# Altium PCB PCB_all_try.PcbDoc (part 3 of 5)
Units mm, origin at the board's own origin, x right, y up, seen from the top; angles counter-clockwise.
Board outline 345 x 240 mm, 2 copper layers (Top Layer, Bottom Layer); 484 components, 419 nets, 1569 pads, 699 vias.
Unrouted connection lines stored in the file: 63.
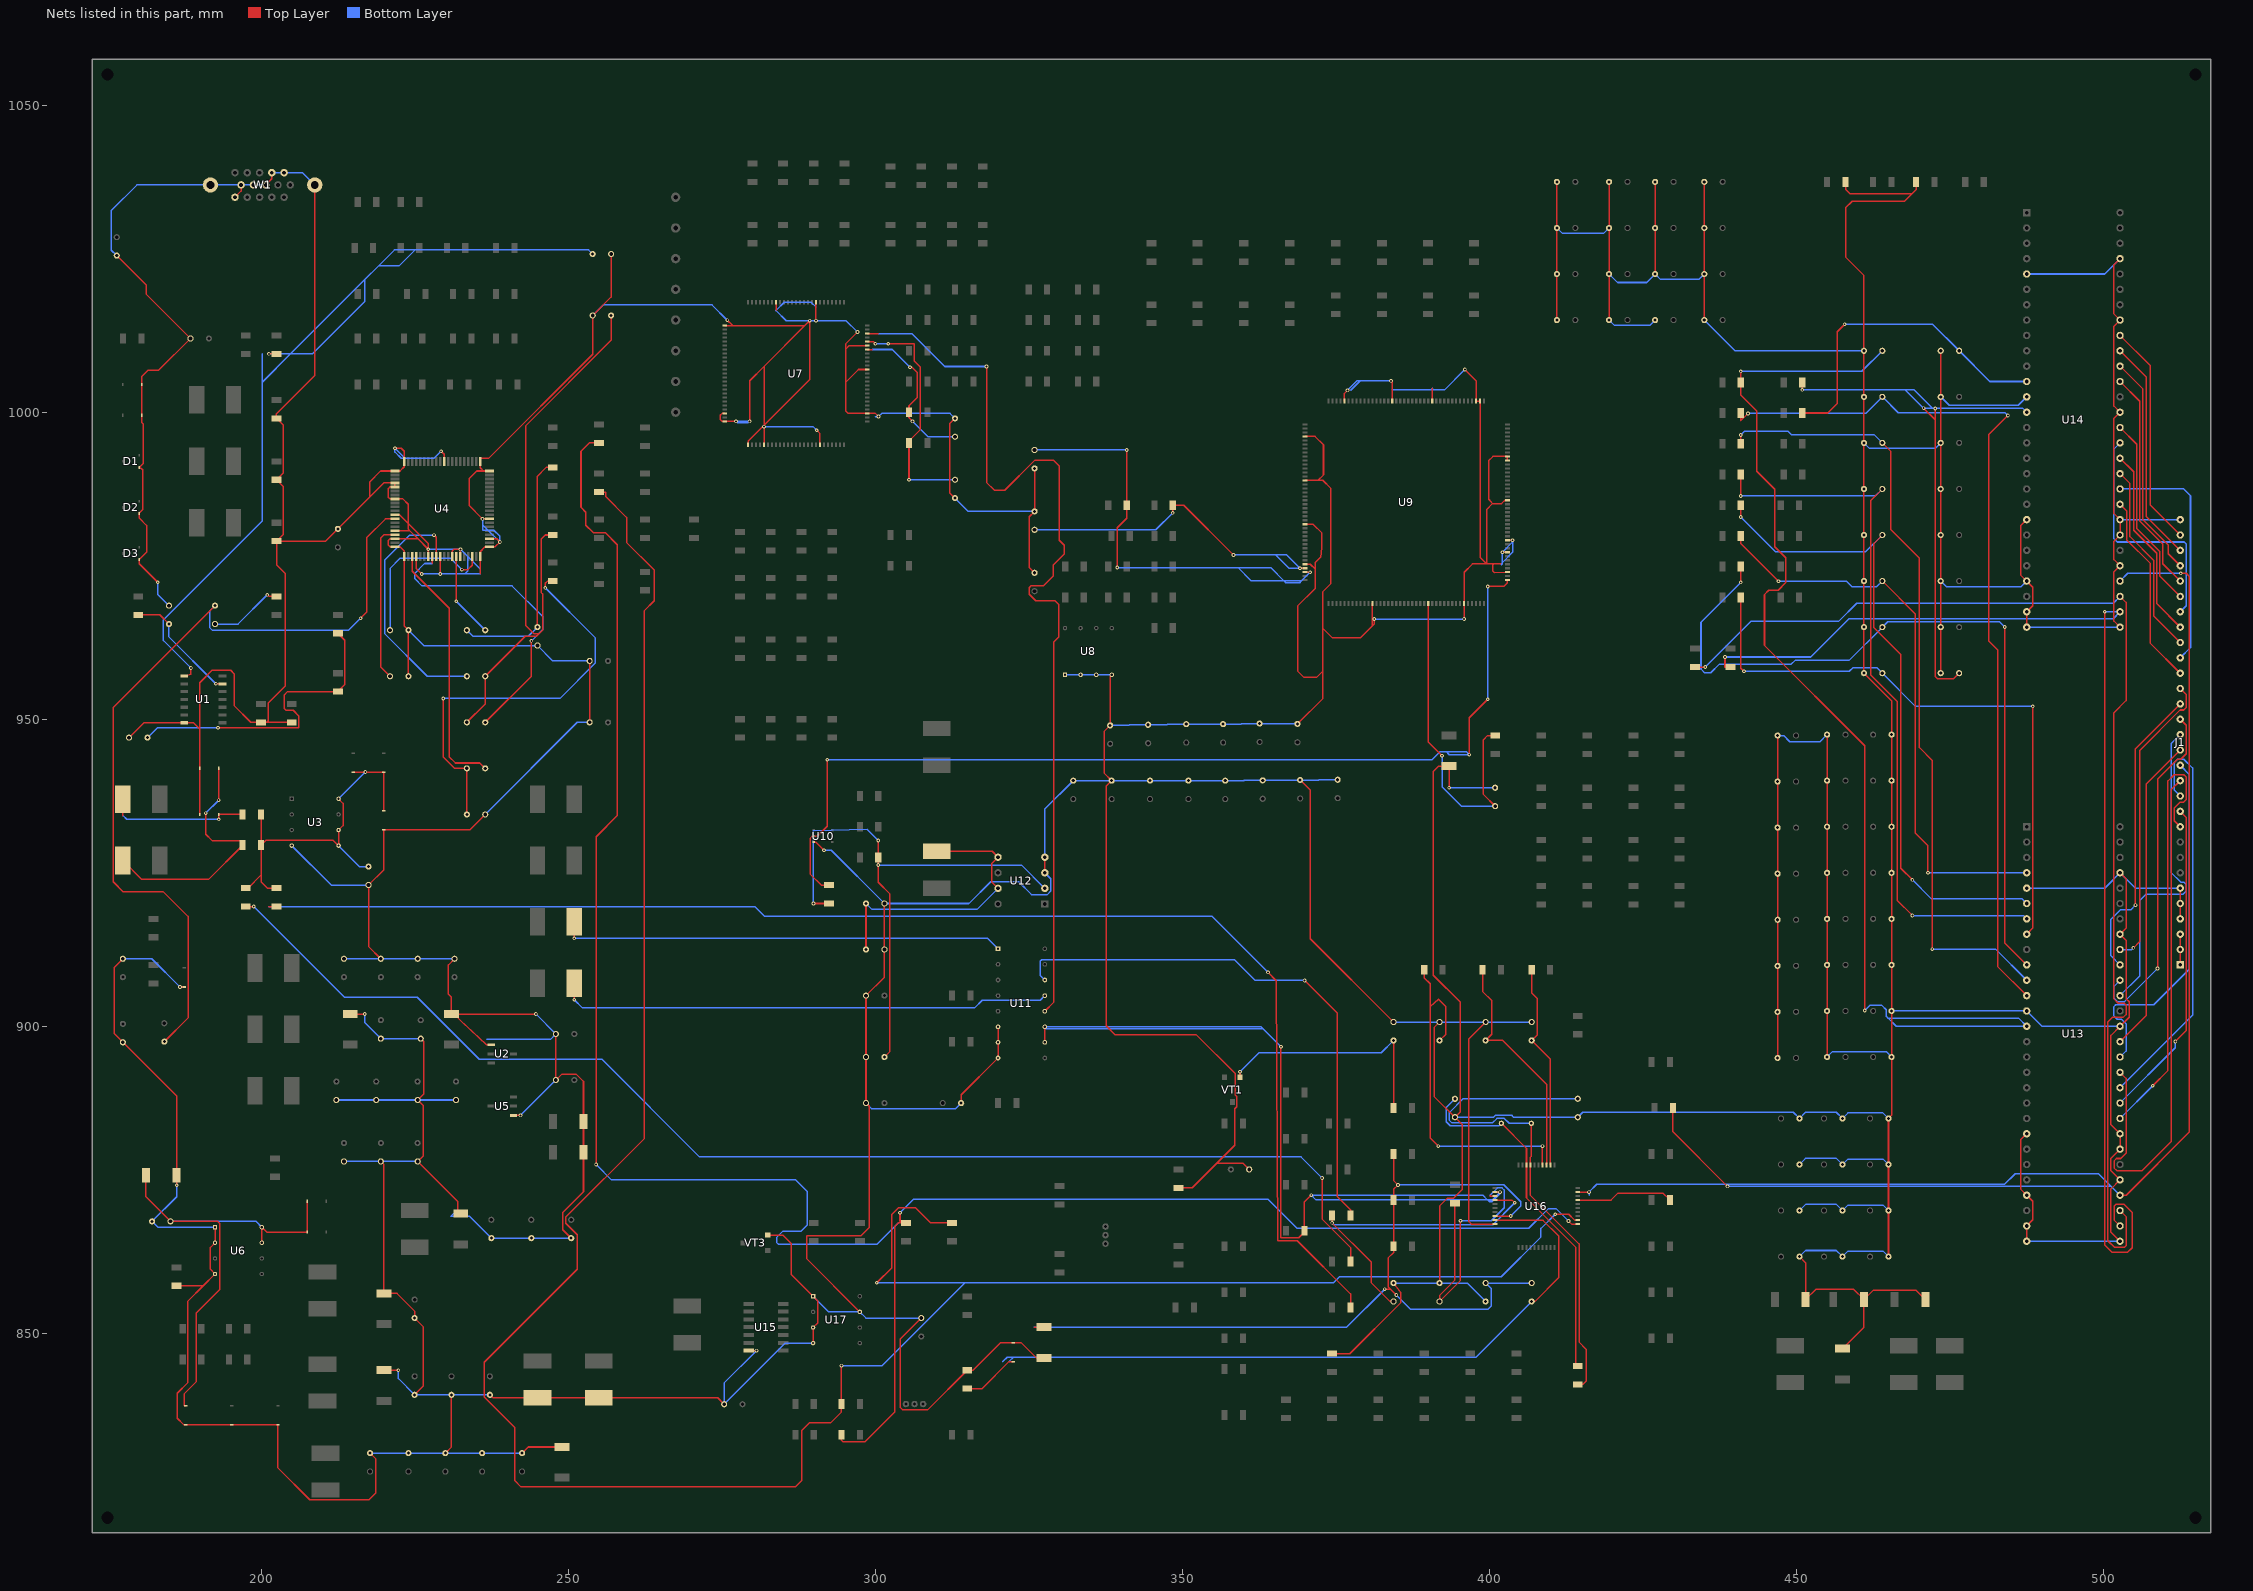
[diagram p3: the nets of this part, all layers, seen from the top]

## Via types
v1: diameter 0.6, hole 0.3, Top Layer to Bottom Layer, 699 vias

## Nets (pads, with @x,y where several pads share a name; then routed paths per layer and width w, separated by ;. In a path a pad name is that pad's centre, name@x,y a point inside that pad or via, vN(x,y) a via of type N, cw(c..) or ccw(c..) an arc to the next point about the centre after c; other vN are vias at no path point) (continued)
GA6: C112.2 R146.1 U14.12 | length 53.3
  Top Layer w0.25: R146.1@450.95,999.85 450.95,999.871 455.117,999.871 456.641,1001.395 456.641,1013.104 v1(457.86,1014.324)
  Bottom Layer w0.25: v1(457.86,1014.324) 472.176,1014.324 C112.2@476.5,1010 481.5,1005 U14.12@487.5,1005
GA7: C109.2 R145.1 U14.14 | length 95.7
  Top Layer w0.25: v1(450.95,1003.63) R145.1@450.95,1004.85 ; v1(470.713,1000.658) 472.618,998.753 ; v1(472.618,1000.613) 472.618,998.753 ; C109.2@476.5,957.5 475.615,956.615 472.948,956.615 472.618,956.945 472.618,998.753
  Bottom Layer w0.25: v1(450.95,1003.63) 467.741,1003.63 ; 472.161,1000.658 469.189,1003.63 467.741,1003.63 ; U14.14@487.5,1000 486.887,1000.613 v1(472.618,1000.613) 470.758,1000.613 v1(470.713,1000.658) 467.741,1003.63
GB0: C106.2 R144.1 U13.8 | length 99.6
  Top Layer w0.25: R144.1@440.95,969.85 440.95,958.317 v1(441.458,957.809) ; U13.8@487.5,915 488.493,915.993 v1(488.493,952.094)
  Bottom Layer w0.25: v1(441.458,957.809) 458.622,957.809 459.207,958.393 463.107,958.393 C106.2@464,957.5 469.406,952.094 v1(488.493,952.094)
GB1: C103.2 R143.1 U13.10 | length 129.4
  Top Layer w0.25: v1(440.95,972.287) R143.1@440.95,974.85 ; v1(483.921,965.022) 483.921,913.579 U13.10@487.5,910
  Bottom Layer w0.25: v1(440.95,972.287) 434.467,965.804 434.467,958.164 435.051,957.58 436.067,957.58 437.464,958.977 449.174,958.977 449.783,959.587 458.587,959.587 C103.2@464,965 464.879,965.879 483.064,965.879 v1(483.921,965.022)
GB2: C100.2 R142.1 U13.4 | length 94.2
  Top Layer w0.25: R142.1@440.95,979.85 440.95,978.611 v1(447.097,972.464) ; C100.2@464,972.5 469.341,967.159 469.341,931.469 471.424,929.386 v1(471.424,925)
  Bottom Layer w0.25: v1(447.097,972.464) 458.14,972.464 459.003,971.601 463.101,971.601 C100.2@464,972.5 ; v1(471.424,925) U13.4@487.5,925
GB3: C96.2 R141.1 U13.6 | length 108
  Top Layer w0.25: v1(440.95,982.929) R141.1@440.95,984.85 ; C96.2@464,980 462.617,978.617 462.617,964.888 466.979,960.526 466.979,925.754 v1(468.884,923.849)
  Bottom Layer w0.25: v1(440.95,982.929) 446.614,977.265 461.265,977.265 C96.2@464,980 ; v1(468.884,923.849) 471.932,920.801 486.699,920.801 U13.6@487.5,920
GB4: C92.2 R140.1 U13.7 | length 118.9
  Top Layer w0.25: v1(440.95,986.358) R140.1@440.95,989.85 ; C92.2@464,987.5 462.113,985.613 462.113,957.214 466.395,952.932 466.395,920.521 v1(468.884,918.032)
  Bottom Layer w0.25: v1(440.95,986.358) 462.858,986.358 C92.2@464,987.5 ; v1(468.884,918.032) 486.968,918.032 U13.7@487.5,917.5
GB5: C87.2 R139.1 U13.11 | length 128.8
  Top Layer w0.25: R139.1@440.95,994.85 v1(440.95,996.29) ; C87.2@464,995 465.383,993.617 465.383,980.868 470.027,976.224 470.027,945.388 472.11,943.305 v1(472.11,912.571)
  Bottom Layer w0.25: v1(440.95,996.29) 441.55,996.89 448.633,996.89 449.234,996.29 462.71,996.29 C87.2@464,995 ; v1(472.11,912.571) 482.429,912.571 U13.11@487.5,907.5
GB6: C83.2 R138.1 U13.12 | length 145.9
  Top Layer w0.25: R138.1@440.95,999.85 440.95,998.632 v1(442.112,999.795) ; v1(484.429,999.465) 481.33,996.366 481.33,962.736 482.822,961.244 482.822,909.678 U13.12@487.5,905
  Bottom Layer w0.25: v1(442.112,999.795) 461.295,999.795 C83.2@464,1002.5 466.578,999.922 483.972,999.922 v1(484.429,999.465)
GB7: C79.2 R137.1 U13.14 | length 192.5
  Top Layer w0.25: v1(440.95,1006.653) R137.1@440.95,1004.85 440.95,1002.792 443.56,1000.182 443.56,990.371 446.481,987.45 446.481,978.103 448.275,976.309 448.275,972.252 447.04,971.017 445.516,971.017 444.805,970.305 444.805,962.025 461.137,945.693 v1(461.137,902.589)
  Bottom Layer w0.25: v1(440.95,1006.653) 460.653,1006.653 C79.2@464,1010 ; v1(461.137,902.589) 461.95,903.402 463.935,903.402 464.621,902.716 464.621,901.624 464.9,901.344 ; 464.9,901.344 466.245,900 U13.14@487.5,900 486.156,901.344 464.9,901.344
GND: C1.2 C2.2 C3.2 C4.2 C5.2 C6.2 C7.2 C8.2 C9.2 C10.2 C11.2 C12.2 C13.2 C14.2 C15.2 C17.2 C18.2 C19.2 C25.1 C26.2 C27.1 C28.2 C29.1 C30.2 C31.2 C32.2 C33.2 C34.2 C35.2 C36.2 C37.2 C38.2 C39.2 C40.2 C41.2 C42.2 C43.2 C44.1 C45.1 C46.1 C47.1 C48.1 C49.1 C50.1 C51.1 C52.2 C53.1 C54.1 C55.1 C56.1 C57.2 C58.1 C59.1 C60.1 C61.1 C62.1 C63.1 C64.2 C65.1 C66.1 C67.1 C68.1 C69.1 C70.1 C71.1 C72.1 C73.1 C74.1 C75.1 C76.1 C77.1 C78.1 C79.1 C80.1 C81.1 C82.1 C83.1 C84.1 C85.1 C86.1 C87.1 C88.1 C89.1 C90.1 C91.1 C92.1 C93.1 C94.1 C95.1 C96.1 C97.1 C98.1 C99.1 C100.1 C101.1 C102.1 C103.1 C104.1 C105.1 C106.1 C107.1 C108.1 C109.1 C110.1 C111.1 C112.1 C113.1 C114.1 C115.1 C116.1 C117.1 C118.1 C119.1 C120.1 C121.1 C122.1 C123.1 C124.1 C125.1 C126.1 C127.1 C128.2 C129.2 C130.1 C131.2 C132.2 C133.2 C134.2 C135.2 C136.2 C137.2 C138.1 C139.1 C140.1 C141.1 C142.1 C143.1 C144.1 C145.1 C146.1 C147.1 C148.1 C149.1 C150.1 C151.1 C152.1 C153.1 C154.1 C155.1 C156.1 C157.1 C158.2 C159.1 C160.2 C161.2 C162.1 C163.2 C164.2 C165.1 C166.2 C168.2 C169.2 C170.2 C171.2 C172.1 D1.1 D2.1 D3.1 D8.1 J1.4 J1.5 J1.6 J1.30 L16.1 L17.1 R3.1 R5.1 R15.1 R16.1 R17.1 R49.1 R178.1 R180.1 R204.1 R205.1 R218.1 U1.7 U2.1 U3.4 U4.1 U4.10 U4.20 U4.21 U4.24 U4.25 U4.28 U4.32 U4.36 U4.38 U4.40 U4.41 U4.44 U4.47 U4.50 U4.53 U4.55 U4.60 U4.61 U4.63 U4.68 U4.80 U5.1 U6.1 U6.2 U6.4 U7.1 U7.5 U7.19 U7.28 U7.39 U7.45 U7.58 U7.68 U7.76 U7.98 U7.100 U8.1 U8.2 U8.3 U8.4 U9.12 U9.35 U9.43 U9.48 U9.51 U9.61 U9.71 U9.72 U9.82 U9.83 U9.94 U9.104 U9.116 U9.124 U9.135 U9.146 U9.156 U10.3 U11.6 U11.7 U11.8 U12.3 U12.4 U13.5 U13.13 U13.21 U13.25 U13.27 U13.28 U13.29 U13.33 U13.35 U13.36 U13.43 U13.49 U13.53 U14.5 U14.13 U14.21 U14.25 U14.27 U14.28 U14.29 U14.33 U14.35 U14.36 U14.43 U14.49 U14.53 U15.7 U16.20 U17.1 U17.3 U17.4 U17.7 VT3.2 W1.4 W1.5 W1.6 W1.7 W1.8 W1.11 W1.16 W1.17 ZD1.1 ZD2.1 ZD3.1 ZD4.1 ZD5.1 ZD6.1 ZD7.1 ZD8.1 ZD9.1 | length 3369.4
  Top Layer w0.25: C172.1@176.5,1025.5 181.331,1020.669 181.331,1019.169 C10.2@188.5,1012 183.356,1006.856 181.616,1006.856 180.6,1005.84 ZD1.1@180.6,1004.5 ZD2.1@180.6,999.5 180.6,998.265 180.797,998.068 180.797,991.647 D1.1@180.156,991.006 ; C5.2@177.5,911 176.117,909.617 176.117,898.783 C13.2@177.5,897.4 186.25,888.65 C52.2@186.25,875.75 186.25,874.124 v1(186.258,874.116) ; C11.2@178.5,947 180.92,949.42 U1.7@187.5,949.42 188.976,949.42 190,948.396 ; D1.1@180.15,991 D1.1@180.156,991.006 ; v1(183.185,972.3) 180.15,975.335 D3.1@180.15,976 181.356,977.206 181.356,981.571 180.15,982.777 D2.1@180.15,983.5 180.15,983.564 180.746,984.161 180.746,990.6 D1.1@180.156,991.006 ; R49.1@186.25,857.75 190.58,857.75 ; v1(186.792,906.399) v1(186.792,906.399) ZD4.1@187.5,906.4 ; ZD3.1@190,934.5 ZD5.1@190,942 190,948.396 ; U6.1@192.5,867.29 U6.2@192.5,864.75 191.745,863.995 191.745,860.425 U6.4@192.5,859.67 190.58,857.75 ; W1.11@195.75,1035 196.75,1036 W1.6@196.75,1037 ; W1.8@200.75,1037 201.75,1038 W1.4@201.75,1039 ; R5.1@205,949.5 200.914,949.5 ; W1.16@208.75,1037 208.75,1005.954 202.489,999.693 202.489,999 R15.1@202.5,999 203.632,997.868 203.632,990.132 R16.1@202.5,989 203.632,987.868 203.632,980.132 R17.1@202.5,979 R17.1@202.514,979 ; C14.2@214.5,902 v1(216.882,902) ; C54.1@217.75,830.5 218.643,829.607 218.643,823.976 217.576,822.909 207.924,822.909 202.75,828.084 ZD7.1@202.75,835.15 ZD8.1@195.25,835.15 ZD9.1@187.75,835.15 187.378,835.15 186.36,836.168 186.36,840.257 188.087,841.985 188.087,855.257 190.58,857.75 ; C28.2@219.5,878 220,877.5 C41.2@220,856.5 222.136,856.5 225,853.636 C44.1@225,852.5 226.383,851.117 226.383,841.383 C45.1@225,840 ; C2.2@219.5,911 217.5,913 C15.2@217.5,923 220,925.5 ZD6.1@220,932 234,932 C19.2@236.5,934.5 ; C42.2@220,844 v1(222.355,844) ; U4.36@221.778,980.675 224.243,980.675 ; U4.32@221.778,983.275 222.565,983.275 223.952,981.888 ; v1(221.801,994.138) 222.817,994.138 223.325,993.63 U4.20@223.325,991.972 223.325,991.108 222.642,990.425 U4.21@221.778,990.425 219.456,990.425 217.678,988.647 217.678,986.178 ; C29.1@224,957 C27.1@224,964.5 223.325,965.175 U4.41@223.325,976.528 223.325,977.392 222.642,978.075 U4.40@221.778,978.075 220.98,978.075 220.701,978.354 220.701,979.096 220.98,979.375 U4.38@221.778,979.375 225.543,979.375 ; U4.44@225.275,976.528 225.275,974.553 v1(226.17,973.658) ; C9.2@226,898 226.492,897.508 226.492,888.992 C32.2@225.5,888 226.39,887.11 226.39,878.89 C26.2@225.5,878 232.029,871.471 232.029,869.5 C57.2@232.5,869.5 ; U4.47@227.225,976.528 v1(227.225,977.693) ; v1(229.175,973.658) U4.50@229.175,976.528 ; v1(229.317,993.648) 229.825,993.14 U4.10@229.825,991.972 ; C51.1@230,830.5 231,831.5 C47.1@231,840 ; U4.53@231.125,976.528 231.125,977.397 231.394,977.666 v1(232.467,977.666) ; C4.2@231.5,911 230.505,910.005 230.505,905.231 231,904.736 C6.2@231,902 C6.2@231.318,902 ; U4.55@232.425,976.528 v1@232.425,977.624 ; 235.675,973.67 U4.60@235.675,976.528 235.675,977.276 236.474,978.075 U4.61@237.222,978.075 238.096,978.075 v1(238.888,978.867) 238.38,979.375 U4.63@237.222,979.375 ; U4.68@237.222,982.625 v1(236.068,982.625) 233.865,984.828 233.865,989.16 235.13,990.425 236.22,990.425 ; U4.80@237.222,990.425 236.22,990.425 ; C50.1@237.25,840 237.75,839.5 L16.1@245,839.5 L17.1@255,839.5 274.36,839.5 C158.2@275.4,838.46 ; U2.1@237.5,897 236.728,897 C6.2@231.318,902 ; U5.1@241.1,885.5 v1(242.25,885.5) ; C46.1@242.5,830.5 243.5,831.5 C43.2@249,831.5 ; v1(244.75,902) C6.2@231.318,902 ; C36.2@248,898.75 C38.2@248,891.25 248.925,892.175 251.357,892.175 252.5,891.032 C40.2@252.5,884.5 C35.2@252.5,879.5 252.5,873.073 249.117,869.69 249.117,866.883 C60.1@250.5,865.5 ; C39.2@253.5,949.5 C37.2@253.5,959.5 ; C8.2@257,1025.75 257,1018.75 C18.2@254,1015.75 254,1009.44 237.039,992.48 235.675,992.48 U4.1@235.675,991.972 235.675,990.97 236.22,990.425 ; U7.98@275.5,999.8 275.062,999.8 274.752,999.49 274.752,998.83 275.082,998.5 U7.100@275.5,998.5 v1(277.343,998.5) ; U7.76@275.5,1014.1 276.809,1014.1 ; v1(275.925,1014.984) 276.809,1014.1 ; U7.1@279.3,994.7 279.3,995.278 v1@281.9,997.878 ; U15.7@279.4,847.19 v1(280.67,847.19) ; v1(279.553,998.5) 279.553,1005.109 281.9,1007.456 ; U7.5@281.9,994.7 v1(281.9,997.652) v1@281.9,997.878 ; VT3.2@282.5,866 284.95,866 286.334,864.616 286.334,859.586 U17.1@289.88,856.04 290.627,855.293 290.627,851.707 U17.3@289.88,850.96 U17.4@289.88,848.42 ; 283.85,1016.564 U7.68@283.85,1017.9 ; U10.3@290,930 290.322,930 v1(291.647,928.675) ; v1(290.35,1014.908) U7.58@290.35,1017.9 ; v1(290.492,997.052) 291,996.544 U7.19@291,994.7 ; v1(297.104,1013.054) 295.17,1011.12 295.17,1010.229 ; U17.7@297.5,853.5 288.874,862.126 288.874,865.886 297.688,865.886 299.034,867.232 299.034,886.966 C128.2@298.5,887.5 C129.2@298.5,895 C131.2@298.5,905 301.5,908 C132.2@301.5,912.5 C133.2@301.5,920 ; U7.39@298.7,1006.95 297.274,1006.95 295.17,1004.846 ; U7.45@298.7,1010.85 295.791,1010.85 295.17,1010.229 ; v1(300.543,999.292) 300.035,999.8 U7.28@298.7,999.8 295.614,999.8 295.17,1000.244 295.17,1004.846 ; C171.2@307.5,852.5 304.089,849.089 304.089,837.946 304.444,837.59 308.59,837.59 R205.1@315,844 315.938,844 320.438,848.5 D8.1@322.5,848.5 323.748,848.5 326.248,846 C163.2@327.5,846 ; C55.1@313,986 312.115,986.885 312.115,998.115 C56.1@313,999 ; C130.1@314,887.5 314,888.84 U11.8@320,894.84 U11.7@320,897.38 U11.6@320,899.92 ; C62.1@325.95,973.85 325.069,974.731 325.069,982.969 C61.1@325.95,983.85 C63.1@325.95,990.85 ; U12.3@327.62,925 327.606,925.014 327.606,927.526 U12.4@327.62,927.54 ; U8.4@338.53,957.23 338.25,956.95 C98.1@338.25,949 337.261,948.011 337.261,941.239 C73.1@338.5,940 337.617,939.117 337.617,900.074 339.09,898.601 352.31,898.601 358.648,892.263 358.648,888.795 358.875,888.568 358.875,886.892 358.546,886.563 358.546,880.618 355.625,877.697 ; R218.1@349.4,873.7 351.628,873.7 355.625,877.697 ; C169.2@360.9,876.7 359.903,877.697 355.625,877.697 ; C77.1@368.75,949.25 372.897,953.397 372.897,957.859 ; C66.1@369.2,940.1 370.84,938.46 370.84,914.26 C170.2@384.4,900.7 ; U9.156@370,975.25 370.84,975.25 371.644,974.446 ; U9.146@370,981.75 371.308,981.75 372.741,980.317 372.741,977.963 372.516,976.376 371.644,975.504 371.644,974.446 ; U9.135@370,988.9 372.112,988.9 ; U9.124@370,996.05 371.632,996.05 372.999,994.683 372.999,989.787 372.112,988.9 ; R204.1@374.4,846.7 377.276,846.7 385.54,854.964 385.54,856.691 C162.1@384.4,858.2 ; U9.116@376.4,1001.8 376.4,1003.046 v1(376.908,1003.554) ; U9.12@380.95,968.85 380.95,965.2 ; v1(381.255,966.318) 381.255,965.505 380.95,965.2 ; v1(383.988,1005.103) 384.2,1004.892 U9.104@384.2,1001.8 ; U9.94@390.7,1001.8 390.7,1003.856 ; C159.1@391.9,858.2 391.9,870.741 393.192,872.033 394.208,872.033 395.605,873.43 395.605,883.995 C161.2@394.4,885.2 ; C164.2@391.9,900.7 391.008,899.808 391.008,888.592 C161.2@394.4,885.2 ; v1(393.45,938.85) C64.2@393.45,942.35 391.744,942.35 390.881,941.486 390.881,908.329 395.3,903.91 395.3,886.1 C161.2@394.4,885.2 ; v1(395.9,966.318) U9.35@395.9,968.85 395.9,973.928 397.256,975.284 399.578,975.284 ; v1(396.013,1006.958) 397.85,1005.121 U9.83@397.85,1001.8 U9.82@398.5,1001.8 398.5,976.362 399.578,975.284 ; C166.2@399.4,900.7 396.672,897.972 396.672,868.198 397.069,867.8 U16.20@400.95,867.8 ; 401.879,975.284 400.72,975.284 ; v1(402.133,977.2) U9.48@402.95,977.2 ; U9.43@402.95,973.95 402.717,973.95 400.812,973.887 400.558,974.141 400.558,975.122 400.72,975.284 ; U9.51@402.95,979.15 403.778,979.15 v1(403.784,979.145) ; U9.61@402.95,985.65 402.536,985.65 401.999,985.113 400.532,985.113 ; U9.71@402.95,992.15 U9.72@402.95,992.8 400.599,992.8 399.923,992.124 399.923,985.831 400.532,985.113 ; C76.1@411,1015 C74.1@411,1022.5 C72.1@411,1030 C70.1@411,1037.5 ; C91.1@419.5,1015 C86.1@419.5,1022.5 C82.1@419.5,1030 C78.1@419.5,1037.5 ; C102.1@427,1022.5 C99.1@427,1030 C95.1@427,1037.5 ; C117.1@435,1015 C114.1@435,1022.5 C111.1@435,1030 C108.1@435,1037.5 ; C107.1@446.95,894.85 C104.1@446.95,902.35 C101.1@446.95,909.85 C97.1@446.95,917.35 C93.1@446.95,924.85 C88.1@446.95,932.35 C84.1@446.95,939.85 C80.1@446.95,947.35 ; C138.1@450.5,862.5 451.5,861.5 C135.2@451.5,855.5 453.148,857.148 459.352,857.148 C136.2@461,855.5 ; C127.1@455,895 C125.1@455,902.5 C123.1@455,910 C121.1@455,917.5 C119.1@455,925 C116.1@455,932.5 C113.1@455,940 C110.1@455,947.5 ; C134.2@457.5,847.5 461,851 C136.2@461,855.5 ; R180.1@458,1037.5 458,1036.307 458.724,1035.583 468.814,1035.583 ; C140.1@465,862.5 C143.1@465,870 C146.1@465,877.5 C149.1@465,885 465.5,885.5 C150.1@465.5,895 C151.1@465.5,902.5 C152.1@465.5,910 C153.1@465.5,917.5 C154.1@465.5,925 C155.1@465.5,932.5 C156.1@465.5,940 C157.1@465.5,947.5 465.5,953 C106.1@461,957.5 C103.1@461,965 C100.1@461,972.5 C96.1@461,980 C92.1@461,987.5 C87.1@461,995 C83.1@461,1002.5 C79.1@461,1010 461,1022.248 458,1025.248 458,1033.272 459.079,1034.351 467.582,1034.351 468.814,1035.583 ; R178.1@469.5,1037.5 469.5,1036.269 468.814,1035.583 ; C137.2@471,855.5 469.453,857.047 462.547,857.047 C136.2@461,855.5 ; C109.1@473.5,957.5 C126.1@473.5,965 C124.1@473.5,972.5 C122.1@473.5,980 C120.1@473.5,987.5 C118.1@473.5,995 C115.1@473.5,1002.5 C112.1@473.5,1010 ; U13.28@487.5,865 U13.27@487.5,867.5 488.493,868.493 488.493,871.507 U13.25@487.5,872.5 486.512,873.488 486.512,881.512 U13.21@487.5,882.5 ; U14.28@487.5,965 U14.27@487.5,967.5 488.493,968.493 488.493,971.507 U14.25@487.5,972.5 486.512,973.488 486.512,981.512 U14.21@487.5,982.5 ; U13.29@502.7,865 501.217,866.483 501.217,873.517 U13.33@502.7,875 501.217,876.483 501.217,878.517 U13.35@502.7,880 U13.36@502.7,882.5 501.217,883.983 501.217,898.517 U13.43@502.7,900 504.183,901.483 504.183,903.983 503.682,904.484 503.682,914.018 U13.49@502.7,915 503.682,915.982 503.682,924.018 U13.53@502.7,925 ; U14.29@502.7,965 501.701,965.999 501.701,974.001 U14.33@502.7,975 501.701,975.999 501.701,979.001 U14.35@502.7,980 U14.36@502.7,982.5 501.701,983.499 501.701,999.001 U14.43@502.7,1000 501.701,1000.999 501.701,1014.001 U14.49@502.7,1015 501.701,1015.999 501.701,1024.001 U14.53@502.7,1025 ; J1.4@512.5,917.5 J1.5@512.5,920 J1.6@512.5,922.5 ; 190,948.396 190,955.937 192.024,957.961 195.072,957.961 195.605,957.428 195.605,952.221 198.326,949.5 R3.1@200,949.5 200.914,949.5 ; 200.914,949.5 201.168,949.754 201.168,952.627 203.911,955.37 203.911,973.76 202.514,975.157 R17.1@202.514,979 ; R17.1@202.514,979 210.5,979 C25.1@212.5,981 217.678,986.178 ; 217.678,986.178 219.975,988.475 U4.24@221.778,988.475 U4.25@221.778,987.825 220.974,987.825 220.701,987.552 220.701,986.154 220.98,985.875 U4.28@221.778,985.875 223.089,985.875 223.952,985.012 223.952,981.888 ; 223.952,981.888 223.952,980.967 224.243,980.675 ; 223.952,981.888 227.225,978.615 v1(227.225,977.693) ; 224.243,980.675 225.543,979.375 ; 225.543,979.375 v1(227.225,977.693) ; 276.809,1014.1 288.544,1014.1 ; v1@281.9,997.878 289.352,1005.33 v1(289.352,1014.908) 288.544,1014.1 ; v1@281.9,997.878 281.9,1007.456 ; 281.9,1007.456 288.544,1014.1 ; 295.17,1004.846 295.17,1010.229 ; 371.644,974.446 371.644,971.295 368.783,968.433 368.783,957.859 369.824,956.818 371.856,956.818 372.897,957.859 ; 372.112,988.9 372.872,988.9 374.204,987.569 374.204,972.094 372.897,970.788 372.897,964.794 ; 372.897,957.859 372.897,964.794 ; 372.897,964.794 374.447,963.244 378.994,963.244 380.95,965.2 ; 399.578,975.284 400.72,975.284 ; 399.578,975.284 399.578,984.159 400.532,985.113
  Bottom Layer w0.25: C172.1@176.5,1025.5 175.616,1026.384 175.616,1032.84 179.775,1037 W1.17@191.75,1037 W1.6@196.75,1037 W1.7@198.75,1037 W1.8@200.75,1037 ; C5.2@177.5,911 182.191,911 v1(186.792,906.399) ; v1(183.185,972.3) 183.185,970.315 C7.2@185,968.5 ; v1(186.258,874.116) 186.258,872.258 C49.1@182.25,868.25 183.21,867.29 U6.1@192.5,867.29 ; W1.4@201.75,1039 W1.5@203.75,1039 206.75,1039 W1.16@208.75,1037 ; U3.4@205,929.42 211.42,923 C15.2@217.5,923 ; C34.2@212.25,888 C33.2@218.75,888 C32.2@225.5,888 C31.2@231.75,888 ; C30.2@213.5,878 C28.2@219.5,878 C26.2@225.5,878 ; C1.2@213.5,911 C2.2@219.5,911 C3.2@225.5,911 C4.2@231.5,911 ; v1(216.882,902) 216.882,900.618 C12.2@219.5,898 C9.2@226,898 ; C54.1@217.75,830.5 C53.1@224,830.5 C51.1@230,830.5 C48.1@236,830.5 C46.1@242.5,830.5 ; v1(222.355,844) 222.355,842.645 C45.1@225,840 C47.1@231,840 C50.1@237.25,840 ; C27.1@224,964.5 226.5,962 C17.2@245,962 247.5,959.5 C37.2@253.5,959.5 ; v1(226.17,973.658) v1(229.175,973.658) v1@229.378,973.658 ; v1(227.225,977.693) v1@232.432,977.693 ; v1@229.175,973.861 v1@229.378,973.658 ; v1(229.317,993.648) 228.159,992.49 223.449,992.49 ; 232.029,869.5 231.325,869.5 230.861,869.036 233.964,869.036 C58.1@237.5,865.5 C59.1@244,865.5 C60.1@250.5,865.5 ; v1@232.425,977.624 v1(232.467,977.666) ; v1@232.435,977.697 v1@232.432,977.693 ; 235.675,973.67 235.663,973.658 ; 235.675,974.457 233.68,976.452 ; 235.687,973.658 235.663,973.658 ; v1(236.068,982.625) 236.068,981.687 ; C19.2@236.5,934.5 251.5,949.5 C39.2@253.5,949.5 ; 236.728,897.865 247.115,897.865 C36.2@248,898.75 v1(244.75,902) ; v1(242.25,885.5) C38.2@248,891.25 ; C18.2@254,1015.75 255.723,1017.473 273.436,1017.473 v1(275.925,1014.984) ; 279.298,998.245 277.597,998.245 v1(277.343,998.5) v1(279.553,998.5) ; v1(280.67,847.19) 275.4,841.92 C158.2@275.4,838.46 285.36,848.42 U17.4@289.88,848.42 ; v1(281.9,997.652) 289.891,997.652 v1(290.492,997.052) ; U17.1@289.88,856.04 292.42,853.5 U17.7@297.5,853.5 298.5,852.5 C171.2@307.5,852.5 ; 290.35,1017.118 289.563,1017.905 285.191,1017.905 283.85,1016.564 ; v1(291.647,928.675) 292.825,928.675 C133.2@301.5,920 315.251,920 318.795,923.544 323.367,923.544 325.45,921.461 328.041,921.461 328.6,922.02 328.6,924.02 U12.3@327.62,925 ; v1(297.104,1013.054) 295.25,1014.908 v1(290.35,1014.908) v1(289.352,1014.908) 285.506,1014.908 ; C128.2@298.5,887.5 299.388,886.612 313.112,886.612 C130.1@314,887.5 ; 300.035,999.292 v1(300.543,999.292) 301.051,999.8 312.2,999.8 C56.1@313,999 ; C55.1@313,986 315.15,983.85 C61.1@325.95,983.85 ; U12.4@327.62,927.54 327.62,935.37 C75.1@332.25,940 C73.1@338.5,940 C71.1@344.75,940 C69.1@351,940 C68.1@357,940 360.02,940 360.07,940.05 C67.1@363.1,940.05 366.116,940.05 366.166,940.1 C66.1@369.2,940.1 372.212,940.1 372.262,940.15 C65.1@375.3,940.15 ; U8.1@330.91,957.23 U8.2@333.45,957.23 U8.3@335.99,957.23 U8.4@338.53,957.23 ; C98.1@338.25,949 341.3,949 341.4,949.1 C94.1@344.45,949.1 347.497,949.1 347.597,949.2 C89.1@350.65,949.2 ; C77.1@368.75,949.25 365.683,949.25 365.633,949.3 C81.1@362.6,949.3 359.662,949.3 359.562,949.2 C85.1@356.65,949.2 353.598,949.2 ; v1(376.908,1003.554) 378.457,1005.103 378.965,1005.103 ; 377.416,1003.554 378.965,1005.103 ; v1(381.255,966.318) v1(395.9,966.318) ; v1(383.988,1005.103) 378.965,1005.103 ; C162.1@384.4,858.2 C159.1@391.9,858.2 396.4,858.2 C165.1@399.4,855.2 ; C170.2@384.4,900.7 C164.2@391.9,900.7 C166.2@399.4,900.7 C168.2@406.9,900.7 ; 390.779,1003.935 390.474,1003.63 ; v1(393.45,938.85) C90.1@400.95,938.85 ; C161.2@394.4,885.2 400.676,885.2 400.989,885.513 403.633,885.513 403.946,885.2 C160.2@414.4,885.2 415.203,886.003 449.497,886.003 C147.1@450.5,885 451.503,886.003 456.497,886.003 C148.1@457.5,885 458.401,885.901 464.099,885.901 C149.1@465,885 ; v1(396.013,1006.958) 392.685,1003.63 390.474,1003.63 ; 401.879,975.284 402.133,975.538 ; 401.98,975.182 402.133,975.335 402.133,975.538 ; v1(403.784,979.145) v1@403.784,978.851 ; C72.1@411,1030 411.894,1029.106 418.606,1029.106 C82.1@419.5,1030 ; C91.1@419.5,1015 420.38,1014.12 426.12,1014.12 C105.1@427,1015 ; C86.1@419.5,1022.5 420.883,1021.117 425.617,1021.117 C102.1@427,1022.5 427.887,1021.613 434.113,1021.613 C114.1@435,1022.5 ; C117.1@435,1015 440,1010 C79.1@461,1010 ; C80.1@446.95,947.35 447.929,947.35 448.926,946.353 453.853,946.353 C110.1@455,947.5 ; C138.1@450.5,862.5 451.498,863.498 456.502,863.498 C139.1@457.5,862.5 458.397,863.397 464.103,863.397 C140.1@465,862.5 ; C141.1@450.5,870 451.491,870.991 456.509,870.991 C142.1@457.5,870 458.39,870.89 464.11,870.89 C143.1@465,870 ; C144.1@450.5,877.5 451.484,878.484 456.516,878.484 C145.1@457.5,877.5 458.383,878.383 464.117,878.383 C146.1@465,877.5 ; C127.1@455,895 455.883,895.883 464.617,895.883 C150.1@465.5,895 ; C87.1@461,995 461.895,994.105 472.605,994.105 C118.1@473.5,995 ; C151.1@465.5,902.5 U13.13@487.5,902.5 490,900 U13.43@502.7,900 ; C124.1@473.5,972.5 474.399,971.601 486.601,971.601 U14.25@487.5,972.5 ; C115.1@473.5,1002.5 474.883,1001.117 486.117,1001.117 U14.13@487.5,1002.5 ; U13.28@487.5,865 U13.29@502.7,865 ; U13.5@487.5,922.5 500.2,922.5 U13.53@502.7,925 505.2,922.5 J1.6@512.5,922.5 ; U14.28@487.5,965 U14.29@502.7,965 ; U14.5@487.5,1022.5 500.2,1022.5 U14.53@502.7,1025 ; U14.36@502.7,982.5 J1.30@512.5,982.5 ; 223.449,992.49 222.807,992.49 221.801,993.496 v1(221.801,994.138) 223.449,992.49 ; v1@229.378,973.658 233.172,973.658 ; v1@232.432,977.693 232.439,977.693 v1(232.467,977.666) ; v1(232.467,977.666) 233.68,976.452 ; 233.172,973.658 235.663,973.658 ; 233.172,973.658 233.68,974.166 233.68,976.452 ; 236.068,981.687 236.963,980.792 ; 236.068,981.687 236.068,980.792 236.963,980.792 ; 236.963,980.792 237.901,980.792 238.888,979.805 v1(238.888,978.867) 236.963,980.792 ; 283.85,1016.564 283.845,1016.559 285.496,1014.908 285.506,1014.908 ; 283.85,1016.564 285.506,1014.908 ; C89.1@350.65,949.2 353.598,949.2 ; C89.1@350.65,949.2 350.662,949.188 353.598,949.2 ; 390.474,1003.63 384.2,1003.63 390.474,1003.63 ; 402.133,975.538 403.784,977.189 v1@403.784,978.851 ; 402.133,975.538 v1(402.133,977.2) v1@403.784,978.851
HP_SENSE: R217.2 U16.37 | length 15.9
  Top Layer w0.25: U16.37@414.4,871.7 419.811,871.7 420.957,872.846 428.254,872.846 R217.2@429.4,871.7
HSYNC_D: U7.48 U11.12 | length 158.2
  Top Layer w0.25: U7.48@298.7,1012.8 300.532,1012.8 ; v1(318.135,1007.44) 318.135,988.568 319.43,987.273 321.081,987.273 325.958,992.149 329.057,992.149 329.971,991.235 329.971,979.145 330.784,978.332 330.784,976.909 329.006,975.131 329.006,973.328 327.407,971.729 325.374,971.729 325.071,971.426 325.071,970.354 326.136,969.289 329.286,969.289 329.921,968.654 329.921,963.422 329.108,962.609 329.108,903.948 U11.12@327.62,902.46
  Bottom Layer w0.25: v1(318.135,1007.44) 311.328,1007.44 305.968,1012.8 ; 305.968,1012.8 300.532,1012.8 305.968,1012.8
HSYNC_IN: R184.1 U11.14 | length 89.3
  Top Layer w0.25: v1(369.926,907.466) 375.234,902.157 375.234,872.294 377.4,870.128 R184.1@377.4,869.2
  Bottom Layer w0.25: U11.14@327.62,907.54 326.847,908.313 326.847,910.59 327.101,910.844 358.496,910.844 361.874,907.466 v1(369.926,907.466)
HSYNC_X: R170.1 U9.41 U10.2 | length 165.8
  Top Layer w0.25: v1(292.202,943.407) 292.202,932.576 290.576,930.95 U10.2@290,930.95 289.752,930.95 289.458,930.656 289.458,924.738 291.196,923 R170.1@292.5,923 ; v1(396.739,944.238) 396.739,950.256 v1(399.745,953.262) ; v1(399.745,971.626) 402.336,971.626 402.95,972.24 U9.41@402.95,972.65
  Bottom Layer w0.25: v1(292.202,943.407) 390.652,943.407 391.991,944.746 392.982,944.746 ; v1(399.745,953.262) v1(399.745,971.626) ; 392.982,944.746 396.231,944.746 v1(396.739,944.238) 393.49,944.238 392.982,944.746
INPUT_SELECT: R181.1 U11.10 U11.11 U16.12 | length 184.3
  Top Layer w0.25: U11.10@327.62,897.38 U11.11@327.62,899.92 ; v1(366.065,896.671) 366.065,865.575 368.954,865.575 369.9,866.521 R181.1@369.9,866.7 369.9,871.423 v1(370.992,872.515) ; U16.12@400.95,873 v1(401.726,873)
  Bottom Layer w0.25: v1(366.065,896.671) 363.144,899.592 ; 363.144,899.592 327.62,899.592 U11.11@327.62,899.92 362.816,899.92 363.144,899.592 ; 399.72,871.728 399.974,871.474 400.482,871.474 401.726,872.719 v1(401.726,873) 400.454,871.728 399.72,871.728 ; 399.72,871.728 398.932,872.515 v1(370.992,872.515) 371.78,871.728 399.72,871.728
LCD_CLK: R130.1 U13.31 U14.31 | length 193.4
  Top Layer w0.25: R130.1@433.5,958.5 v1(435.153,958.5) ; U13.31@502.7,870 503.682,869.018 503.682,864.26 503.428,864.006 501.802,864.006 500.713,865.096 500.713,900.712 501.498,901.497 503.25,901.497 503.679,901.926 503.679,903.478 503.4,903.757 502.412,903.757 501.701,904.469 501.701,951.052 503.682,953.033 503.682,969.018 U14.31@502.7,970
  Bottom Layer w0.25: v1(435.153,958.5) 442.64,965.987 456.921,965.987 459.816,968.883 501.583,968.883 U14.31@502.7,970
LCD_DE: R129.1 U13.30 U14.30 | length 193.7
  Top Layer w0.25: v1(438.373,960.14) 438.373,958.5 R129.1@439.25,958.5 ; v1(500.202,967.5) 500.202,864.413 501.396,863.219 503.936,863.219 504.673,863.956 504.673,869.696 503.377,870.991 502.006,870.991 501.721,870.707 501.721,868.479 U13.30@502.7,867.5
  Bottom Layer w0.25: v1(438.373,960.14) 452.343,960.14 458.586,966.383 501.583,966.383 U14.30@502.7,967.5 v1(500.202,967.5)
LCD_VCC: J1.1 J1.2 J1.3 | length 5
  Top Layer w0.25: J1.1@512.5,910 J1.2@512.5,912.5 J1.3@512.5,915
LVDS_PD: R213.2 U13.32 U14.32 U16.39 | length 288.8
  Top Layer w0.25: U16.39@414.4,873 v1(416.235,873) ; R213.2@429.9,886.7 429.9,882.823 v1(438.785,873.938) ; U13.32@502.7,872.5 503.697,872.5 513.983,882.786 513.983,973.263 513.486,973.76 v1(512.583,973.76)
  Bottom Layer w0.25: 416.235,872.492 v1(416.235,873) 417.503,874.268 438.785,874.268 ; U13.32@502.7,872.5 501.262,873.938 ; U14.32@502.7,972.5 503.96,973.76 v1(512.583,973.76) ; 438.785,874.268 483.895,874.268 485.623,875.995 499.205,875.995 501.262,873.938 ; 438.785,874.268 v1(438.785,873.938) 501.262,873.938
MCU_H_IN: L11.2 U11.13 | length 80.7
  Top Layer w0.25: v1(251,904.316) L11.2@251,907
  Bottom Layer w0.25: v1(251,904.316) 252.321,902.995 316.179,902.995 317.424,904.24 326.86,904.24 U11.13@327.62,905
MCU_ISP_SCL: R12.1 R185.1 | length 209.1
  Top Layer w0.25: R12.1@197.5,919.5 v1(198.806,919.5) ; v1(372.77,875.309) 372.77,868.604 377.4,863.974 R185.1@377.4,861.7
  Bottom Layer w0.25: v1(198.806,919.5) 213.583,904.723 225.425,904.723 235.509,894.639 255.499,894.639 271.399,878.738 369.341,878.738 v1(372.77,875.309)
MCU_ISP_SDA: R13.1 R186.1 | length 230.3
  Top Layer w0.25: 201.275,919.5 R13.1@202.5,919.5 ; v1(363.957,908.787) 365.305,907.438 365.534,865.071 368.741,865.071 377.4,856.412 R186.1@377.4,854.2
  Bottom Layer w0.25: 201.27,919.505 201.28,919.505 ; 201.275,919.5 201.28,919.505 ; v1(363.957,908.787) 354.787,917.956 281.94,917.956 280.391,919.505 201.28,919.505
MCU_SCL1: R24.1 R230.2 R234.1 U16.32 | length 420.6
  Top Layer w0.25: R24.1@255,987 256.134,987 256.134,986.257 259.519,982.872 259.519,978.782 264.008,974.293 264.008,969.289 262.357,967.638 262.357,881.67 249.621,868.934 249.621,867.928 251.485,866.064 251.485,860.425 236.347,845.287 236.347,839.622 241.325,834.644 241.325,826.008 242.341,824.992 286.995,824.992 288.011,826.008 288.011,834.136 289.357,835.482 292.798,835.482 294.5,837.184 R234.1@294.5,838.5 v1(294.5,844.753) ; v1(300.253,858.233) 302.688,860.667 302.688,869.362 303.784,870.458 306.553,870.458 309.011,868 R230.2@312.5,868 ; v1(410.727,869.409) 412.925,869.409 413.884,868.45 U16.32@414.4,868.45
  Bottom Layer w0.25: v1(294.5,844.753) 301.142,844.753 314.622,858.233 ; v1(300.253,858.233) 314.622,858.233 ; v1(410.727,869.409) 408.397,867.079 408.397,865.673 401.93,859.206 375.604,859.206 374.631,858.233 314.622,858.233
MCU_SDA1: R23.1 R229.2 R235.1 U16.31 | length 356.2
  Top Layer w0.25: v1(254.559,877.494) 254.559,930.885 258.013,934.339 258.013,978.408 256.032,980.389 254.079,980.389 252.885,981.583 252.885,983.717 252.095,984.507 252.095,993.648 253.447,995 R23.1@255,995 ; R235.1@294.5,833.5 294.5,832.612 294.754,832.358 298.348,832.358 303.192,837.201 303.192,867.402 303.79,868 R229.2@305,868 304.038,868.248 v1(304.038,869.645) ; v1(412.877,868.308) 413.385,867.8 U16.31@414.4,867.8
  Bottom Layer w0.25: v1(254.559,877.494) 257.073,874.979 287.071,874.979 288.95,873.1 288.95,867.664 287.884,866.597 284.912,866.597 283.947,865.632 283.947,864.819 284.226,864.54 300.33,864.54 303.79,868 ; v1(304.038,869.645) 306.248,871.855 363.947,871.855 368.671,867.131 406.434,867.131 409.567,870.263 410.922,870.263 v1(412.877,868.308)
MCU_V_IN: L10.2 U11.1 | length 72.4
  Top Layer w0.25: v1(251,914.324) L10.2@251,917
  Bottom Layer w0.25: v1(251,914.324) 318.296,914.324 U11.1@320,912.62
NetC7_1: C7.1 R6.2 U1.13 | length 19.6
  Top Layer w0.25: R6.2@180,967 183.5,967 C7.1@185,965.5 ; v1(192.634,955.77) U1.13@193.7,955.77
  Bottom Layer w0.25: C7.1@185,965.5 185,963.404 v1(192.634,955.77)
NetC8_1: C8.1 R7.2 U1.1 | length 155.7
  Top Layer w0.25: U1.1@187.5,957.04 188.57,957.326 v1(188.57,958.342) ; v1(201.27,1009.5) R7.2@202.5,1009.5
  Bottom Layer w0.25: v1(188.57,958.342) 184.099,962.812 184.099,966.216 200.177,982.294 200.177,1004.875 ; 200.177,1009.5 200.177,1004.875 ; v1(201.27,1009.5) 204.803,1009.5 ; C8.1@254,1025.75 253.336,1026.414 225.044,1026.414 ; 200.177,1004.875 204.803,1009.5 ; 204.803,1009.5 216.891,1021.588 ; 204.803,1009.5 208.359,1009.5 216.891,1018.032 216.891,1021.588 ; 216.891,1021.588 219.126,1023.823 ; 219.126,1023.823 221.717,1026.414 225.044,1026.414 ; 219.126,1023.823 222.453,1023.823 225.044,1026.414
NetC11_1: C11.1 R11.2 R14.1 | length 51.7
  Top Layer w0.25: v1(192.989,948.614) 206.146,948.614 206.146,950.544 205.232,951.459 204.059,951.459 203.78,951.738 203.78,953.969 204.311,954.5 R11.2@212.5,954.5 213.639,955.639 213.639,962.861 R14.1@212.5,964
  Bottom Layer w0.25: C11.1@181.5,947 183.114,948.614 v1(192.989,948.614)
NetC15_1: C15.1 D4.2 D5.2 R9.2 R10.2 R12.2 R13.2 U3.5 U3.6 U3.8 ZD6.2 | length 62.6
  Top Layer w0.25: R12.2@197.5,922.5 197.865,922.5 200,924.635 ; R9.2@200,934.5 R10.2@200,929.5 ; R13.2@202.5,922.5 201.044,922.5 200,923.544 200,924.635 ; U3.8@212.62,937.04 213.36,936.3 213.36,932.7 U3.6@212.62,931.96 U3.5@212.62,929.42 211.765,930.275 200.775,930.275 R10.2@200,929.5 ; D4.2@215,941.4 v1(216.98,941.4) D5.2@220,941.4 ZD6.2@220,935.1 ; 200,924.635 R10.2@200,929.5
  Bottom Layer w0.25: U3.5@212.62,929.42 216.04,926 C15.1@217.5,926 ; U3.8@212.62,937.04 v1(216.98,941.4)
NetC16_1: C16.1 C20.1 U4.33 | length 137.2
  Top Layer w0.25: C16.1@184.25,897.5 188.112,901.362 188.112,917.88 184.099,921.893 177.571,921.893 175.92,923.544 175.92,951.92 C20.1@192.5,968.5 ; v1(216.205,966.445) 217.221,967.461 217.221,979.602 220.244,982.625 U4.33@221.778,982.625
  Bottom Layer w0.25: C20.1@192.5,968.5 191.618,967.618 191.618,964.921 192.024,964.514 214.274,964.514 v1(216.205,966.445)
NetC17_1: C17.1 C21.2 R19.2 | length 40.2
  Top Layer w0.25: C17.1@245,965 245,989.584 246.416,991 R19.2@247.5,991
  Bottom Layer w0.25: C21.2@233.5,964.5 234.502,963.498 243.498,963.498 C17.1@245,965
NetC18_1: C18.1 C22.2 C23.2 R20.2 | length 97.3
  Top Layer w0.25: C23.2@233.5,949.5 236.5,952.5 C22.2@236.5,957 243.024,963.524 244.856,963.524 245.262,963.93 ; R20.2@247.5,980 246.273,980 245.593,979.32 245.593,970.661 245.897,970.356 245.897,964.565 245.262,963.93 ; C18.1@257,1015.75 257,1011.71 243.061,997.771 243.061,965.319 244.45,963.93 245.262,963.93
NetC19_1: C19.1 C24.2 R21.2 | length 66.5
  Top Layer w0.25: v1(229.667,953.389) 229.667,943.864 231.531,942 C24.2@233.5,942 C19.1@233.5,934.5 ; v1(246.278,971.398) 246.278,972.144 246.634,972.5 R21.2@247.5,972.5
  Bottom Layer w0.25: v1(229.667,953.389) 248.666,953.389 254.381,959.104 254.381,963.295 v1(246.278,971.398)
NetC20_2: C20.2 R22.2 | length 12.1
  Top Layer w0.25: v1(201.016,970.255) 201.27,970 R22.2@202.5,970
  Bottom Layer w0.25: C20.2@192.5,965.5 196.261,965.5 v1(201.016,970.255)
NetC21_1: C21.1 U4.54 | length 14
  Top Layer w0.25: v1(231.775,969.225) U4.54@231.775,976.528
  Bottom Layer w0.25: v1(231.775,969.225) C21.1@236.5,964.5
NetC22_1: C22.1 U4.49 | length 41.6
  Top Layer w0.25: v1(228.168,979.983) 228.525,979.626 U4.49@228.525,976.528
  Bottom Layer w0.25: v1(228.168,979.983) 224.206,979.983 220.116,975.893 220.116,963.955 227.072,957 C22.1@233.5,957
NetC23_1: C23.1 U4.48 | length 51.3
  Top Layer w0.25: 227.875,975.372 U4.48@227.875,976.528 ; C23.1@236.5,949.5 244.018,957.018 v1(244.018,962.762)
  Bottom Layer w0.25: 227.863,975.36 226.619,975.36 ; 227.875,975.372 226.63,975.372 226.619,975.36 ; v1(244.018,962.762) 245.897,964.641 245.897,966.673 240.868,971.702 226.212,971.702 225.044,972.871 225.044,973.785 226.619,975.36
NetC24_1: C24.1 U4.43 | length 41.8
  Top Layer w0.25: U4.43@224.625,976.528 224.625,974.103 230.657,968.07 230.657,943.864 231.642,942.879 235.621,942.879 C24.1@236.5,942
NetC27_2: C27.2 U4.58 | length 26.7
  Top Layer w0.25: v1(232.689,974.369) 233.68,974.369 234.375,975.064 U4.58@234.375,976.528
  Bottom Layer w0.25: C27.2@221,964.5 221,974.567 222.679,976.246 230.813,976.246 v1(232.689,974.369)
NetC29_2: C29.2 U4.37 | length 25.6
  Top Layer w0.25: C29.2@221,957 219.492,958.508 219.492,979.521 219.996,980.025 U4.37@221.778,980.025
NetC49_2: C49.2 C52.1 D6.2 D7.2 U6.7 U6.8 ZD9.2 | length 80.2
  Top Layer w0.25: C52.1@181.25,875.75 181.25,872.25 C49.2@185.25,868.25 192.911,868.25 193.243,867.918 193.243,857.098 189.408,853.262 189.408,842.086 187.452,840.13 187.452,838.25 ZD9.2@187.75,838.25 ; U6.7@200.12,864.75 U6.8@200.12,867.29 200.91,866.5 D7.2@207.5,866.5 D6.2@207.5,871.5
  Bottom Layer w0.25: C49.2@185.25,868.25 199.16,868.25 U6.8@200.12,867.29
NetC55_2: C55.2 R98.1 U7.46 | length 38.6
  Top Layer w0.25: U7.46@298.7,1011.5 299.673,1011.5 v1(300.025,1011.149) ; v1(302.133,1011.149) 306.349,1011.149 306.349,1008.335 307.372,1007.312 307.372,997.171 305.5,995.299 R98.1@305.5,995 v1(305.5,989)
  Bottom Layer w0.25: v1(300.025,1011.149) v1(302.133,1011.149) ; v1(305.5,989) C55.2@313,989
NetC56_2: C56.2 R99.1 U7.44 | length 29.7
  Top Layer w0.25: U7.44@298.7,1010.2 299.508,1010.2 ; v1(305.664,1007.313) 305.992,1007.313 306.853,1006.452 306.853,1002.407 305.5,1001.054 R99.1@305.5,1000 305.5,999.095 v1(306.085,998.51)
  Bottom Layer w0.25: 299.508,1010.2 302.777,1010.2 ; 299.517,1010.209 302.768,1010.209 302.777,1010.2 ; v1(305.664,1007.313) 302.777,1010.2 ; v1(306.085,998.51) 308.595,996 C56.2@313,996
NetC61_2: C61.2 R108.1 U9.157 | length 55.5
  Top Layer w0.25: v1(348.45,983.602) R108.1@348.45,984.85 348.45,984.86 350.241,984.86 v1(358.343,976.757) ; v1(369.164,974.598) 369.166,974.6 U9.157@370,974.6
  Bottom Layer w0.25: C61.2@325.95,980.85 345.698,980.85 v1(348.45,983.602) ; v1(358.343,976.757) 365.227,976.757 ; 365.227,976.757 367.005,976.757 v1(369.164,974.598) 367.386,974.598 365.227,976.757
NetC63_2: C63.2 R109.1 U9.158 | length 80
  Top Layer w0.25: v1(339.42,974.7) 339.42,981.196 340.95,982.726 R109.1@340.95,984.85 v1(340.95,993.85) ; U9.158@370,973.95 370.802,973.95 v1(370.815,973.938)
  Bottom Layer w0.25: C63.2@325.95,993.85 v1(340.95,993.85) ; v1(339.42,974.7) 359.054,974.7 ; v1(370.815,973.938) 369.392,972.515 ; 359.054,974.7 364.402,974.7 366.586,972.515 ; 359.054,974.7 361.239,972.515 366.586,972.515 ; 366.586,972.515 369.392,972.515 ; 366.586,972.515 366.859,972.243 369.12,972.243 369.392,972.515
NetC90_2: C90.2 R169.2 U9.26 | length 54.5
  Top Layer w0.25: U9.26@390.05,968.85 390.05,966.876 390.055,966.871 390.055,946.315 v1(392.303,944.067) ; C90.2@400.95,935.85 399.034,937.766 399.034,946.661 399.723,947.35 R169.2@400.95,947.35
  Bottom Layer w0.25: v1(392.303,944.067) 392.303,939.013 395.466,935.85 C90.2@400.95,935.85
NetC129_1: C129.1 R170.2 R173.2 U12.2 | length 90.8
  Top Layer w0.25: v1(289.941,920) R170.2@292.5,920 ; v1(300.5,930.257) R173.2@300.5,927.5 v1(300.5,926.262) 300.5,923.442 302.387,921.555 302.387,895.887 C129.1@301.5,895
  Bottom Layer w0.25: v1@289.941,919.988 v1(289.941,920) 289.941,931.824 298.704,932.053 v1(300.5,930.257) ; v1(300.5,926.262) 323.818,926.262 U12.2@327.62,922.46
NetC132_1: C132.1 C133.1 L20.1 U12.5 U12.7 | length 47.1
  Top Layer w0.25: C132.1@298.5,912.5 C133.1@298.5,920 ; L20.1@310,928.5 319.04,928.5 U12.5@320,927.54 318.999,926.539 318.999,923.461 U12.7@320,922.46
  Bottom Layer w0.25: C133.1@298.5,920 299.401,919.099 316.639,919.099 U12.7@320,922.46
NetC159_2: C159.2 R183.2 U16.13 | length 46.5
  Top Layer w0.25: R183.2@394.4,871.2 394.4,858.687 391.9,856.187 C159.2@391.9,855.2 395.3,858.6 v1(395.3,868.35) ; 400.126,872.49 400.126,872.35 U16.13@400.95,872.35
  Bottom Layer w0.25: v1(395.3,868.35) 400.304,868.35 402.412,870.458 402.412,873.354 402.082,873.684 401.32,873.684 400.126,872.49 400.126,872.35
NetC160_1: C160.1 R199.2 U16.7 ZQ1.2 | length 84.6
  Top Layer w0.25: ZQ1.2@406.84,884.2 406.84,878.85 406.7,878.71 U16.7@406.7,877.45 406.7,872.469 414.604,864.565 414.604,848.58 415.798,847.386 415.798,842.264 415.234,841.7 R199.2@414.4,841.7
  Bottom Layer w0.25: ZQ1.2@406.84,884.2 403.25,884.2 402.441,885.009 401.241,885.009 400.553,884.321 393.858,884.321 393.497,884.682 393.497,885.977 395.719,888.2 C160.1@414.4,888.2
NetC161_1: C161.1 R199.1 U16.8 ZQ1.1 | length 58.6
  Top Layer w0.25: ZQ1.1@401.96,884.2 406.05,880.11 U16.8@406.05,877.45 406.05,872.051 414.096,864.005 414.096,844.7 R199.1@414.4,844.7
  Bottom Layer w0.25: C161.1@394.4,888.2 392.989,886.789 392.989,884.453 393.625,883.817 401.577,883.817 ZQ1.1@401.96,884.2
NetC162_2: C162.2 R184.2 U16.14 | length 53.2
  Top Layer w0.25: R184.2@374.4,869.2 v1(374.4,867.994) 380.797,861.597 380.797,858.222 383.819,855.2 C162.2@384.4,855.2 ; U16.14@400.95,871.7 403.705,871.7 v1(404.142,871.263)
  Bottom Layer w0.25: v1(374.4,867.994) 374.73,867.664 400.544,867.664 v1(404.142,871.263)
NetC163_1: C163.1 C165.2 C167.2 R198.1 R200.1 R201.1 U16.18 | length 141.6
  Top Layer w0.25: 325.884,851 C163.1@327.5,851 ; v1(382.961,857.199) 383.921,857.199 ; R198.1@384.4,879.2 384.4,874.881 v1(385.115,874.166) 384.4,873.452 R200.1@384.4,871.7 R201.1@384.4,864.2 384.4,863.143 383.515,862.257 383.515,857.606 383.921,857.199 ; v1(384.861,856.259) 383.921,857.199 ; U16.18@400.95,869.1 v1(403.479,869.1)
  Bottom Layer w0.25: 325.882,851.002 325.885,851.002 ; 325.884,851 325.885,851.002 ; v1(382.961,857.199) 376.764,851.002 325.885,851.002 ; v1(384.861,856.259) 387.172,853.948 399.796,853.948 400.304,854.456 400.304,857.296 C165.2@399.4,858.2 C167.2@406.9,858.2 ; v1(385.115,874.166) 385.166,874.217 402.336,874.217 405.13,871.423 405.13,870.751 v1(403.479,869.1)
NetC164_1: C164.1 R195.1 U16.4 | length 59
  Top Layer w0.25: R195.1@389.4,909.2 389.4,907.887 390.373,906.914 390.373,903.224 ; v1(391.693,880.491) 390.373,881.812 390.373,903.224 ; C164.1@391.9,897.7 392.887,898.687 392.887,903.224 391.711,904.4 390.373,903.224 ; U16.4@408.65,877.45 v1(408.65,880.491)
  Bottom Layer w0.25: v1(391.693,880.491) v1(408.65,880.491)
NetC166_1: C166.1 R194.1 U16.3 | length 38.6
  Top Layer w0.25: R194.1@398.9,909.2 398.9,905.688 400.406,904.182 400.406,898.706 C166.1@399.4,897.7 402.17,897.7 409.346,890.524 409.346,877.718 409.3,877.672 U16.3@409.3,877.45
NetC167_1: C167.1 D8.2 R205.2 U16.19 | length 124.7
  Top Layer w0.25: R205.2@315,841 317.404,841 321.804,845.4 D8.2@322.5,845.4 ; U16.19@400.95,868.45 401.141,868.401 408.759,868.401 411.302,865.857 411.302,859.086 407.416,855.2 C167.1@406.9,855.2
  Bottom Layer w0.25: 320.782,845.4 321.507,846.125 322.529,846.125 ; 321.804,845.4 322.529,846.125 ; C167.1@406.9,855.2 397.825,846.125 322.529,846.125
NetC168_1: C168.1 R193.1 U16.2 | length 33.8
  Top Layer w0.25: R193.1@406.9,909.2 406.9,905.416 407.797,904.519 407.797,898.597 C168.1@406.9,897.7 409.95,894.65 U16.2@409.95,877.45
NetC170_1: C170.1 R208.2 VT1.1 | length 39
  Top Layer w0.25: VT1.1@359.4,891.7 v1(359.4,892.607) ; R208.2@384.4,886.7 C170.1@384.4,897.7
  Bottom Layer w0.25: v1(359.4,892.607) 362.499,895.706 382.406,895.706 C170.1@384.4,897.7
NetJ1_10: J1.10 U13.37 | length 71.4
  Top Layer w0.25: v1(508.025,890.325) 510.489,892.789 510.489,939.952 511.516,940.979 513.08,940.979 513.479,940.58 513.479,936.92 513.08,936.521 512.496,936.521 511.521,935.546 511.521,933.479 J1.10@512.5,932.5
  Bottom Layer w0.25: U13.37@502.7,885 v1(508.025,890.325)
NetJ1_11: J1.11 U13.38 | length 52.4
  Top Layer w0.25: v1(511.708,897.534) 513.479,899.305 513.479,934.021 J1.11@512.5,935
  Bottom Layer w0.25: U13.38@502.7,887.5 511.708,896.508 v1(511.708,897.534)
NetJ1_12: J1.12 U13.39 | length 66.6
  Bottom Layer w0.25: U13.39@502.7,890 514.502,901.802 514.502,942.061 513.08,943.483 512.064,943.483 511.521,942.94 511.521,938.479 J1.12@512.5,937.5
NetJ1_13: J1.13 U13.40 | length 88
  Top Layer w0.25: U13.40@502.7,892.5 503.682,891.518 503.682,879.348 502.813,878.479 502.122,878.479 501.721,878.078 501.721,876.94 502.158,876.503 506.298,876.503 511.017,881.222 511.017,938.517 J1.13@512.5,940
NetJ1_14: J1.14 U13.41 | length 58.5
  Bottom Layer w0.25: U13.41@502.7,895 503.679,895.979 503.679,900.408 502.92,901.167 502.234,901.167 501.701,901.7 501.701,903.224 501.994,903.517 508.191,903.517 513.983,909.309 513.983,941.017 J1.14@512.5,942.5
NetJ1_15: J1.15 U13.42 | length 51.6
  Top Layer w0.25: U13.42@502.7,897.5 506.933,901.733 506.933,939.433 J1.15@512.5,945
NetJ1_16: J1.16 U13.45 | length 52.4
  Bottom Layer w0.25: U13.45@502.7,905 505.892,908.192 505.892,920.496 506.908,921.512 512.971,921.512 513.479,922.02 513.479,923.08 513.08,923.479 512.586,923.479 511.017,925.048 511.017,946.017 J1.16@512.5,947.5
NetJ1_17: J1.17 U13.46 | length 56.1
  Top Layer w0.25: v1(508.813,909.406) 508.813,940.232 512.064,943.483 512.59,943.483 513.479,944.372 513.479,949.021 J1.17@512.5,950
  Bottom Layer w0.25: U13.46@502.7,907.5 501.701,906.501 501.701,904.615 502.294,904.021 503.428,904.021 v1(508.813,909.406)
NetJ1_18: J1.18 U13.47 | length 48.8
  Top Layer w0.25: v1(505.206,919.734) 505.206,945.206 J1.18@512.5,952.5
  Bottom Layer w0.25: U13.47@502.7,910 501.217,911.483 501.217,917.447 502.768,918.997 504.469,918.997 v1(505.206,919.734)
NetJ1_19: J1.19 U13.48 | length 48.8
  Top Layer w0.25: v1(504.876,912.774) 505.892,913.79 505.892,944.931 512.47,951.509 513.08,951.509 513.479,951.908 513.479,954.021 J1.19@512.5,955
  Bottom Layer w0.25: U13.48@502.7,912.5 504.601,912.5 v1(504.876,912.774)
NetJ1_20: J1.20 U14.37 | length 31.6
  Top Layer w0.25: U14.37@502.7,985 503.81,983.89 503.81,979.208 507.652,975.365 507.652,962.348 J1.20@512.5,957.5
NetJ1_21: J1.21 U14.38 | length 39
  Bottom Layer w0.25: U14.38@502.7,987.5 513.08,987.5 514.172,986.408 514.172,961.672 J1.21@512.5,960
NetJ1_22: J1.22 U14.39 | length 31.6
  Top Layer w0.25: U14.39@502.7,990 504.314,988.386 504.314,979.749 508.156,975.907 508.156,966.844 J1.22@512.5,962.5
NetJ1_23: J1.23 U14.40 | length 31.6
  Top Layer w0.25: U14.40@502.7,992.5 504.914,990.286 504.914,980.763 508.66,977.016 508.66,968.84 J1.23@512.5,965
NetJ1_24: J1.24 U14.41 | length 39.6
  Bottom Layer w0.25: U14.41@502.7,995 501.701,994.001 501.701,979.424 502.26,978.865 513.156,978.865 513.486,978.535 513.486,968.486 J1.24@512.5,967.5
NetJ1_25: J1.25 U14.42 | length 31.6
  Top Layer w0.25: U14.42@502.7,997.5 505.418,994.782 505.418,981.066 509.164,977.32 509.164,973.336 J1.25@512.5,970
NetJ1_26: J1.26 U14.45 | length 36.6
  Top Layer w0.25: U14.45@502.7,1005 505.922,1001.778 505.922,982.264 509.668,978.517 509.668,975.332 J1.26@512.5,972.5
NetJ1_27: J1.27 U14.46 | length 36.6
  Top Layer w0.25: U14.46@502.7,1007.5 506.426,1003.774 506.426,982.497 510.565,978.357 510.565,976.935 J1.27@512.5,975
NetJ1_28: J1.28 U14.47 | length 36.6
  Top Layer w0.25: U14.47@502.7,1010 506.93,1005.77 506.93,983.07 J1.28@512.5,977.5
NetJ1_29: J1.29 U14.48 | length 36.6
  Top Layer w0.25: U14.48@502.7,1012.5 507.619,1007.581 507.619,984.881 J1.29@512.5,980
NetL2_2: L2.2 R9.1 ZD3.2 | length 24.1
  Top Layer w0.25: 177.5,934.318 L2.2@177.5,937 ; v1(193.1,933.704) ZD3.2@193.1,934.5 R9.1@197,934.5
  Bottom Layer w0.25: 177.495,934.314 178.105,933.704 178.114,933.704 ; 177.5,934.318 178.114,933.704 ; v1(193.1,933.704) 178.114,933.704
NetL3_2: L3.2 R10.1 ZD5.2 | length 41.9
  Top Layer w0.25: L3.2@177.5,927 180.579,923.921 191.421,923.921 R10.1@197,929.5 197,930.25 192.024,930.25 190.983,931.291 v1(190.983,934.72) ; v1(193.091,936.828) 193.1,936.837 ZD5.2@193.1,942
  Bottom Layer w0.25: v1(190.983,934.72) v1(193.091,936.828)